# Altium PCB PCB8led.PcbDoc
Units mm, origin at the board's own origin, x right, y up, seen from the top; angles counter-clockwise.
Board outline 28.07 x 44.83 mm, 2 copper layers (Top Layer, Bottom Layer); 17 components, 17 nets, 41 pads, 0 vias.
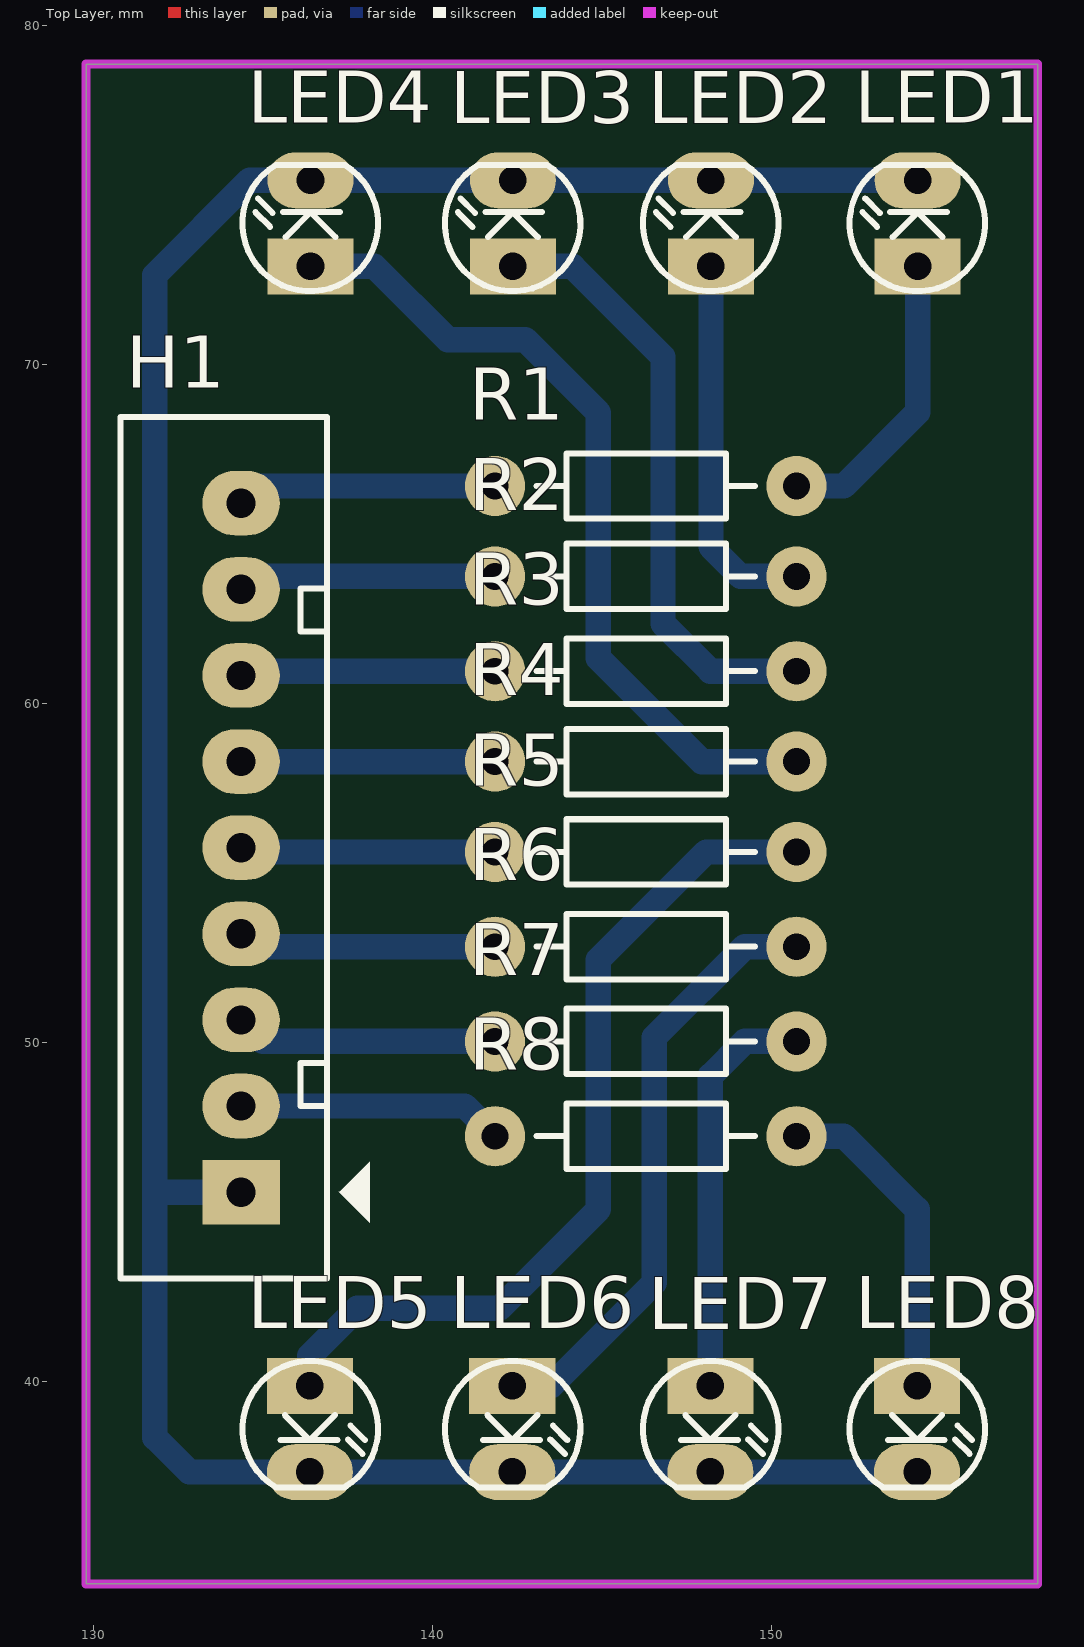
[diagram p0: Top Layer view]
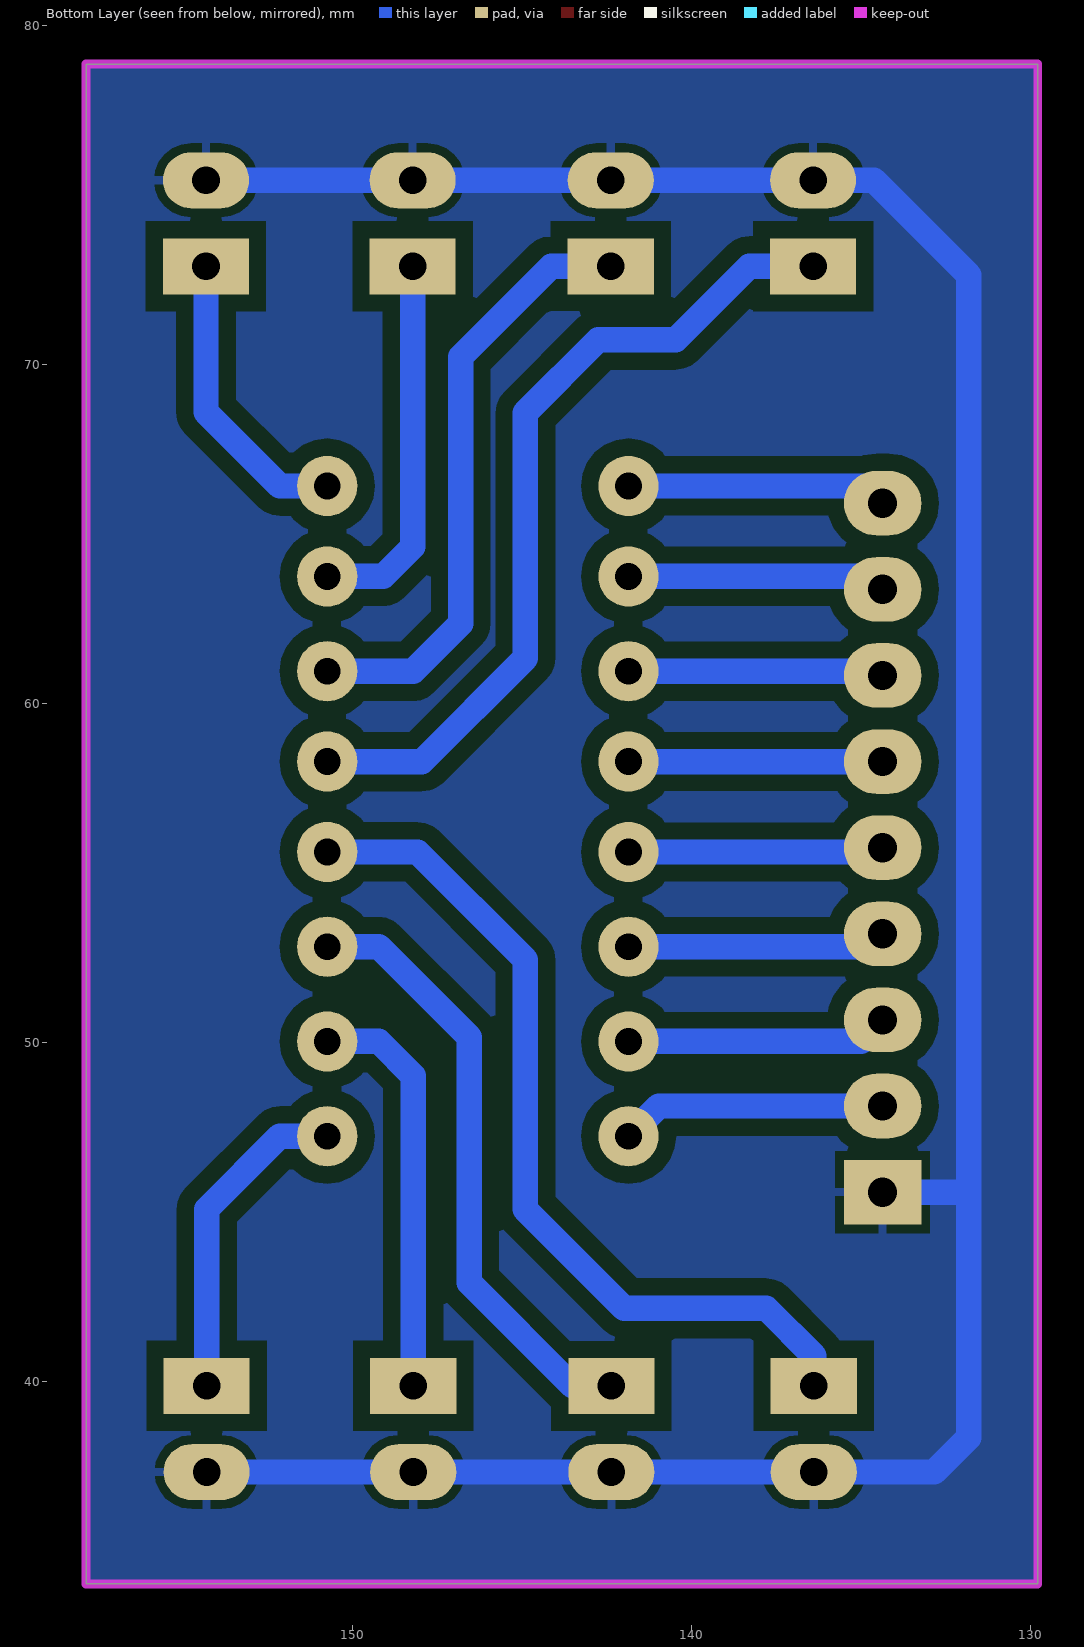
[diagram p1: Bottom Layer view, seen from below]
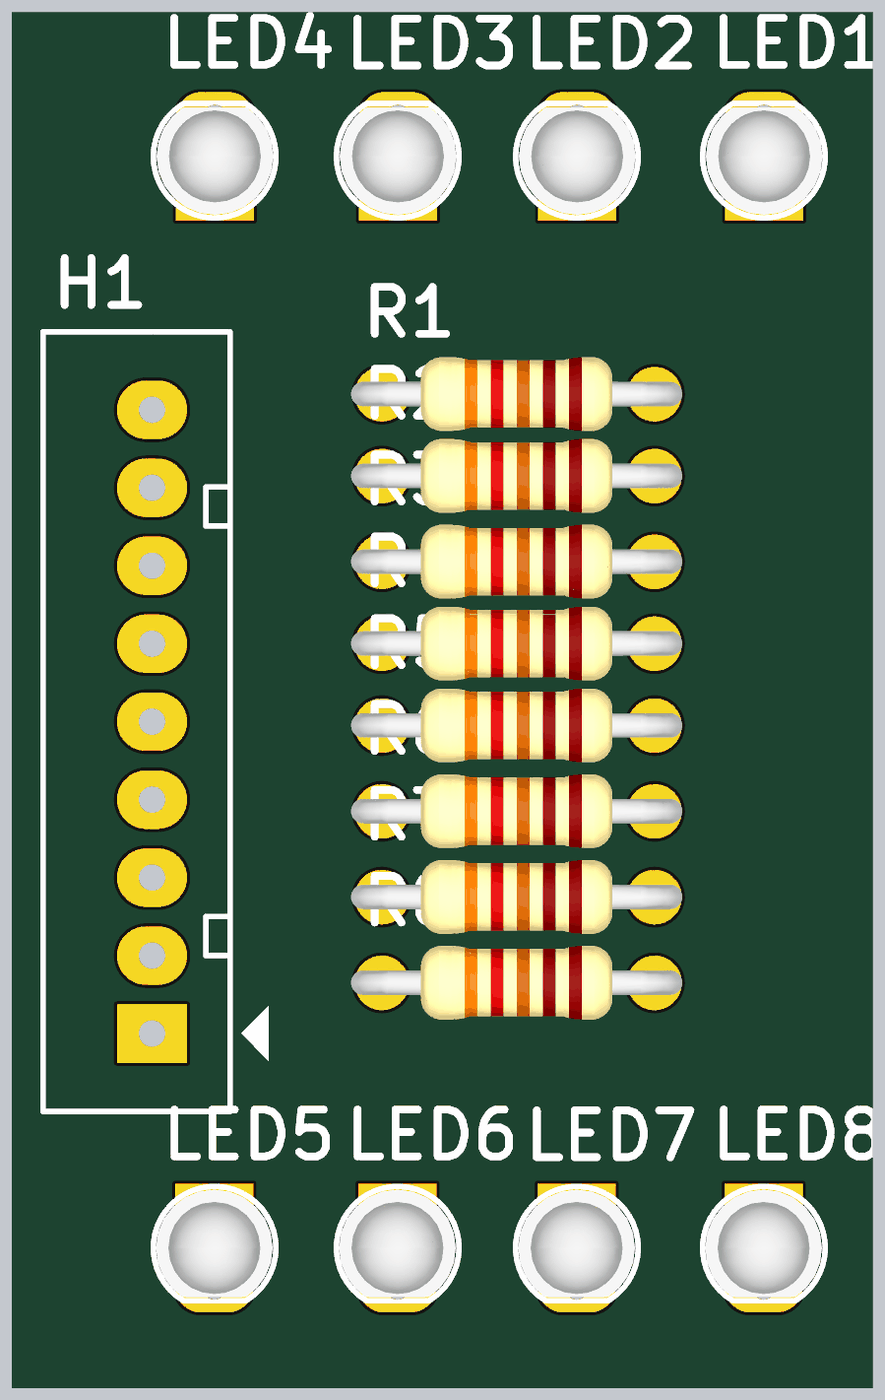
[diagram p2: 3D render of the assembled board from above, using the file's embedded part models]

## Layer stack, top to bottom
Top Solder: solder mask 0.0102, Solder Resist, Dk 3.5
Top Layer: signal copper 0.0356
Dielectric 1: dielectric 0.32, FR-4, Dk 4.8
Bottom Layer: signal copper 0.0356
Bottom Solder: solder mask 0.0102, Solder Resist, Dk 3.5

## Board outline
129.794,78.867 129.794,34.036 157.861,34.036 157.861,78.867

## Design rules (kind name [scope] priority, off if disabled: settings)
Clearance [All] p1: gap=0.5 ignorepadtopadclearanceinfootprint=FALSE
PolygonConnect [All] p1: connectstyle=Relief reliefconductorwidth=0.254 reliefentries=4 polygonreliefangle="90 Angle" airgapwidth=0.254
RoomDefinition Pcb8led [InComponentClass('Pcb8led')] p1: confinementstyle=ConfineIn formatcopy=TRUE lockcomponents=FALSE outline 178.943,26.924 245.11,26.924 245.11,55.372 178.943,55.372
RoutingVias [All] p1: holewidth=0.711 width=1.27 viastyle="Through Hole" minholewidth=0.711 minwidth=1.27 maxholewidth=0.711 maxwidth=1.27
SolderMaskExpansion [All] p1: expansion=0.102
Width [All] p1: maxlimit=1.25 minlimit=0.75 preferedwidth=1.25
30 further rules are at their usual default settings.

## Components (designator, comment, footprint, x,y, rotation, side; value= is the part's Value field where it differs from the comment)
H1 "Header9" Header9 134.366,45.593 r90 top
LED1 "LED" LED-3 154.323,72.898 r90 top value="LED 3 ly Single Colour"
LED2 "LED" LED-3 148.227,72.898 r90 top value="LED 3 ly Single Colour"
LED3 "LED" LED-3 142.385,72.898 r90 top value="LED 3 ly Single Colour"
LED4 "LED" LED-3 136.416,72.898 r90 top value="LED 3 ly Single Colour"
LED5 "LED" LED-3 136.398,39.878 r270 top value="LED 3 ly Single Colour"
LED6 "LED" LED-3 142.367,39.878 r270 top value="LED 3 ly Single Colour"
LED7 "LED" LED-3 148.209,39.878 r270 top value="LED 3 ly Single Colour"
LED8 "LED" LED-3 154.305,39.878 r270 top value="LED 3 ly Single Colour"
R1 "1k" R1/4W 141.859,66.421 r0 top value="R1/4W - 1K"
R2 "1k" R1/4W 141.859,63.754 r0 top value="R1/4W - 1K"
R3 "1k" R1/4W 141.859,60.96 r0 top value="R1/4W - 1K"
R4 "1k" R1/4W 141.859,58.293 r0 top value="R1/4W - 1K"
R5 "1k" R1/4W 141.859,55.626 r0 top value="R1/4W - 1K"
R6 "1k" R1/4W 141.859,52.832 r0 top value="R1/4W - 1K"
R7 "1k" R1/4W 141.859,50.038 r0 top value="R1/4W - 1K"
R8 "1k" R1/4W 141.859,47.244 r0 top value="R1/4W - 1K"

## Footprints (in the part's own frame and the unit in brackets; to place one, negate y for a bottom-side part, rotate by r counter-clockwise, add the part's x,y. Pads: shape width x height; smd on the part's side, far side on the other; paste and mask are expansions set on the pad)
Header9 [mil] "CON9"
  rect 75x90 hole 34: 1(0,0)
  oval 75x90 hole 34: 2(100,0) 3(200,0) 4(300,0) 5(400,0) 6(500,0) 7(600,0) 8(700,0) 9(800,0)
  silkscreen extent -100,-150 900,140
LED-3 [mil] "LED 2 PIN, 3ly Only colour"
  rect 65x100 hole 32: 1(0,0)
  oval 65x100 hole 32: 2(100,0)
  silkscreen extent -29,-78 118,79, body extent -25,-75 113,75, height 217
R1/4W [mil] "R 1/4W, 2 Pin, 350mil"
  round 70 hole 31: 1(0,0) 2(350,0)
  silkscreen extent 48,-38 302,38, body extent -40,-47 386,47, height 111

## Part data
H1: "Header IDC, 9 x 1 Pin Vertical 2.54mm Pitch (Non-Boxed, Male)"
LED1 LED2 LED3 LED4 LED5 LED6 LED7 LED8: "LED Single colour Green and Red"
R1 R2 R3 R4 R5 R6 R7 R8: library part R1/4W, "Resistor 1/4W"

## Nets (pads, with @x,y where several pads share a name; then routed paths per layer and width w, separated by ;. In a path a pad name is that pad's centre, name@x,y a point inside that pad or via, vN(x,y) a via of type N, cw(c..) or ccw(c..) an arc to the next point about the centre after c; other vN are vias at no path point)
gnd: H1.1 LED1.2 LED2.2 LED3.2 LED4.2 LED5.2 LED6.2 LED7.2 LED8.2 | length 83.4
  Bottom Layer w0.75: H1.1 131.826,45.593 ; LED8.2 LED7.2 LED6.2 LED5.2 132.842,37.338 131.826,38.354 131.826,45.593 ; LED1.2 LED2.2 LED3.2 LED4.2 134.62,75.438 131.826,72.644 131.826,45.593
NetH1_2: H1.2 R8.1 | length 7.9
  Bottom Layer w0.75: H1.2 140.97,48.133 R8.1
NetH1_3: H1.3 R7.1 | length 7.8
  Bottom Layer w0.75: H1.3 135.001,50.038 R7.1
NetH1_4: H1.4 R6.1 | length 7.7
  Bottom Layer w0.75: H1.4 134.747,52.832 R6.1
NetH1_5: H1.5 R5.1 | length 7.5
  Bottom Layer w0.75: H1.5 134.493,55.626 R5.1
NetH1_6: H1.6 R4.1 | length 7.5
  Bottom Layer w0.75: H1.6 R4.1
NetH1_7: H1.7 R3.1 | length 7.5
  Bottom Layer w0.75: H1.7 134.493,60.96 R3.1
NetH1_8: H1.8 R2.1 | length 7.7
  Bottom Layer w0.75: H1.8 134.747,63.754 R2.1
NetH1_9: H1.9 R1.1 | length 7.7
  Bottom Layer w0.75: H1.9 134.874,66.421 R1.1
NetLED1_1: LED1.1 R1.2 | length 8.8
  Bottom Layer w0.75: R1.2 152.146,66.421 154.323,68.598 LED1.1
NetLED2_1: LED2.1 R2.2 | length 11.2
  Bottom Layer w0.75: LED2.1 148.227,64.625 149.098,63.754 R2.2
NetLED3_1: LED3.1 R3.2 | length 17.9
  Bottom Layer w0.75: LED3.1 144.145,72.898 146.812,70.231 146.812,62.357 148.209,60.96 R3.2
NetLED4_1: LED4.1 R4.2 | length 24.6
  Bottom Layer w0.75: LED4.1 138.303,72.898 140.462,70.739 142.748,70.739 144.907,68.58 144.907,61.341 147.955,58.293 R4.2
NetLED5_1: LED5.1 R5.2 | length 25.7
  Bottom Layer w0.75: LED5.1 136.398,40.767 137.795,42.164 141.986,42.164 144.907,45.085 144.907,52.451 148.082,55.626 R5.2
NetLED6_1: LED6.1 R6.2 | length 18
  Bottom Layer w0.75: LED6.1 143.51,39.878 146.558,42.926 146.558,50.165 149.225,52.832 R6.2
NetLED7_1: LED7.1 R7.2 | length 12.1
  Bottom Layer w0.75: LED7.1 148.209,49.022 149.225,50.038 R7.2
NetLED8_1: LED8.1 R8.2 | length 9.7
  Bottom Layer w0.75: R8.2 152.146,47.244 154.305,45.085 LED8.1

## Polygon pours and split planes (outlines as drawn)
gnd on Bottom Layer (solid, pour order 6): 129.794,78.867 129.794,34.036 157.861,34.036 157.861,78.867

## Keep-outs
Keep-Out Layer:
  the board outline again, w0.254